# Altium PCB CosmoLink_Alpha_V0.00.PcbDoc
Units mm, origin at the board's own origin, x right, y up, seen from the top; angles counter-clockwise.
Board outline 26.67 x 20.32 mm, 4 copper layers (Top Layer, Layer 1, Layer 2, Bottom Layer), stack 1.587 mm thick; 36 components, 30 nets, 147 pads, 85 vias.
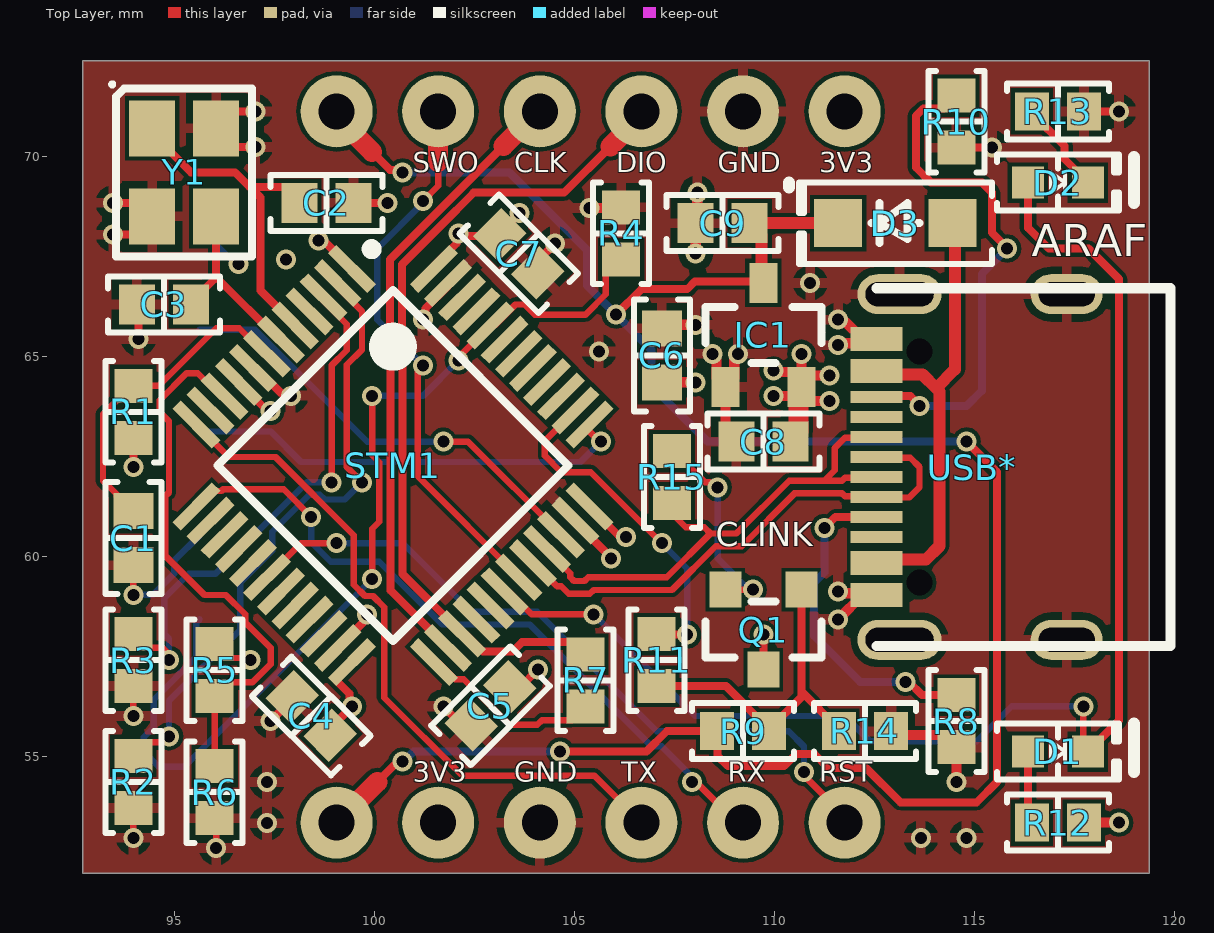
[diagram p0: Top Layer view]
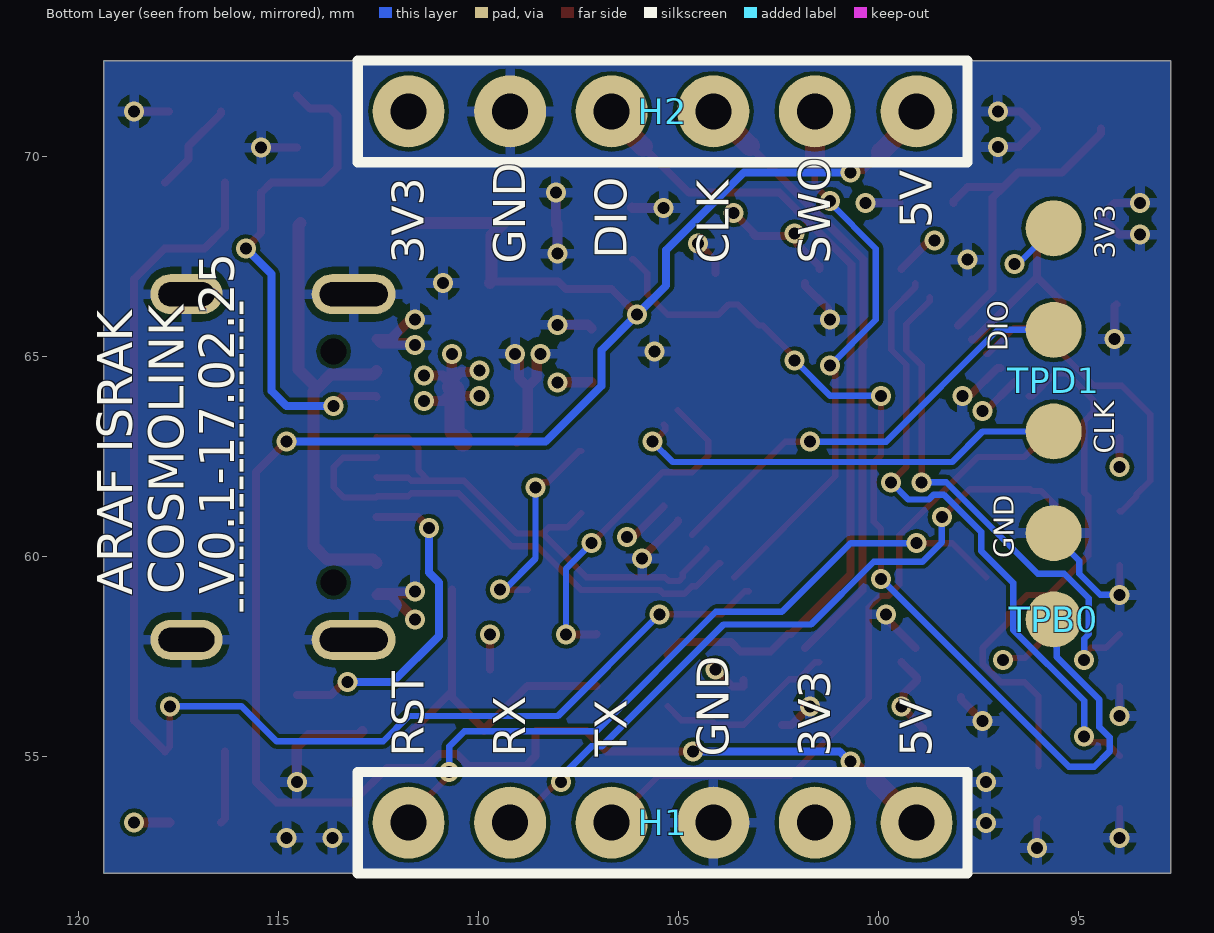
[diagram p1: Bottom Layer view, seen from below]
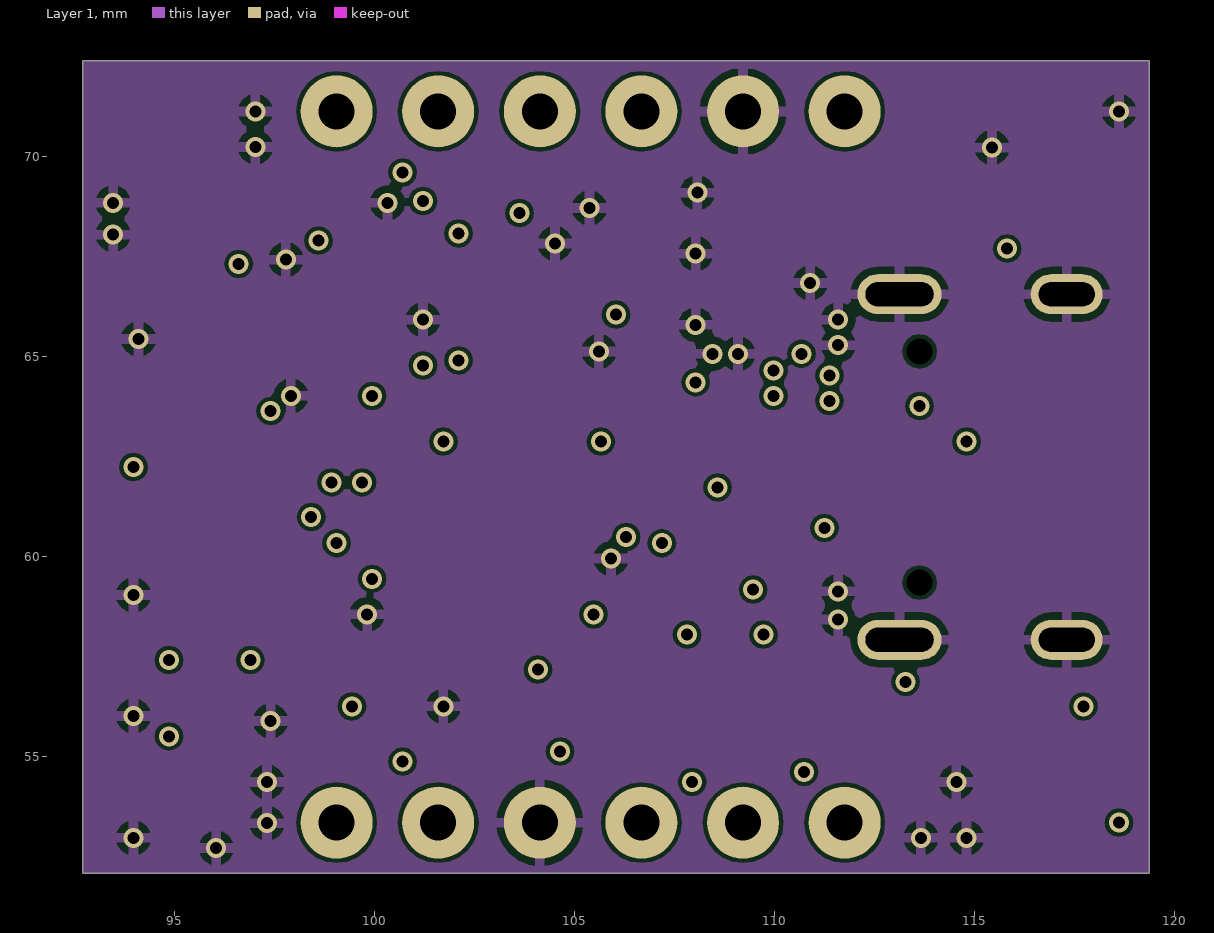
[diagram p2: Layer 1]
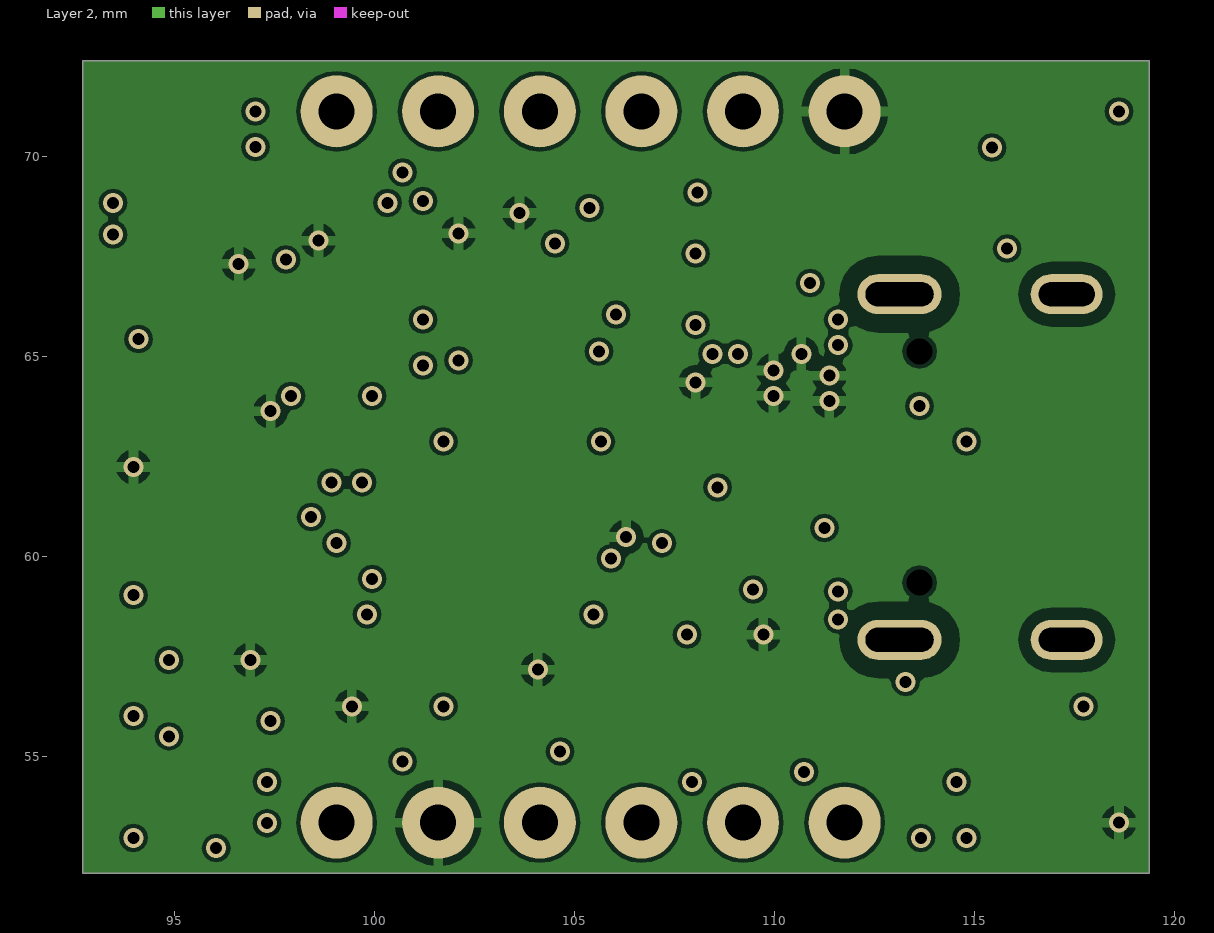
[diagram p3: Layer 2]
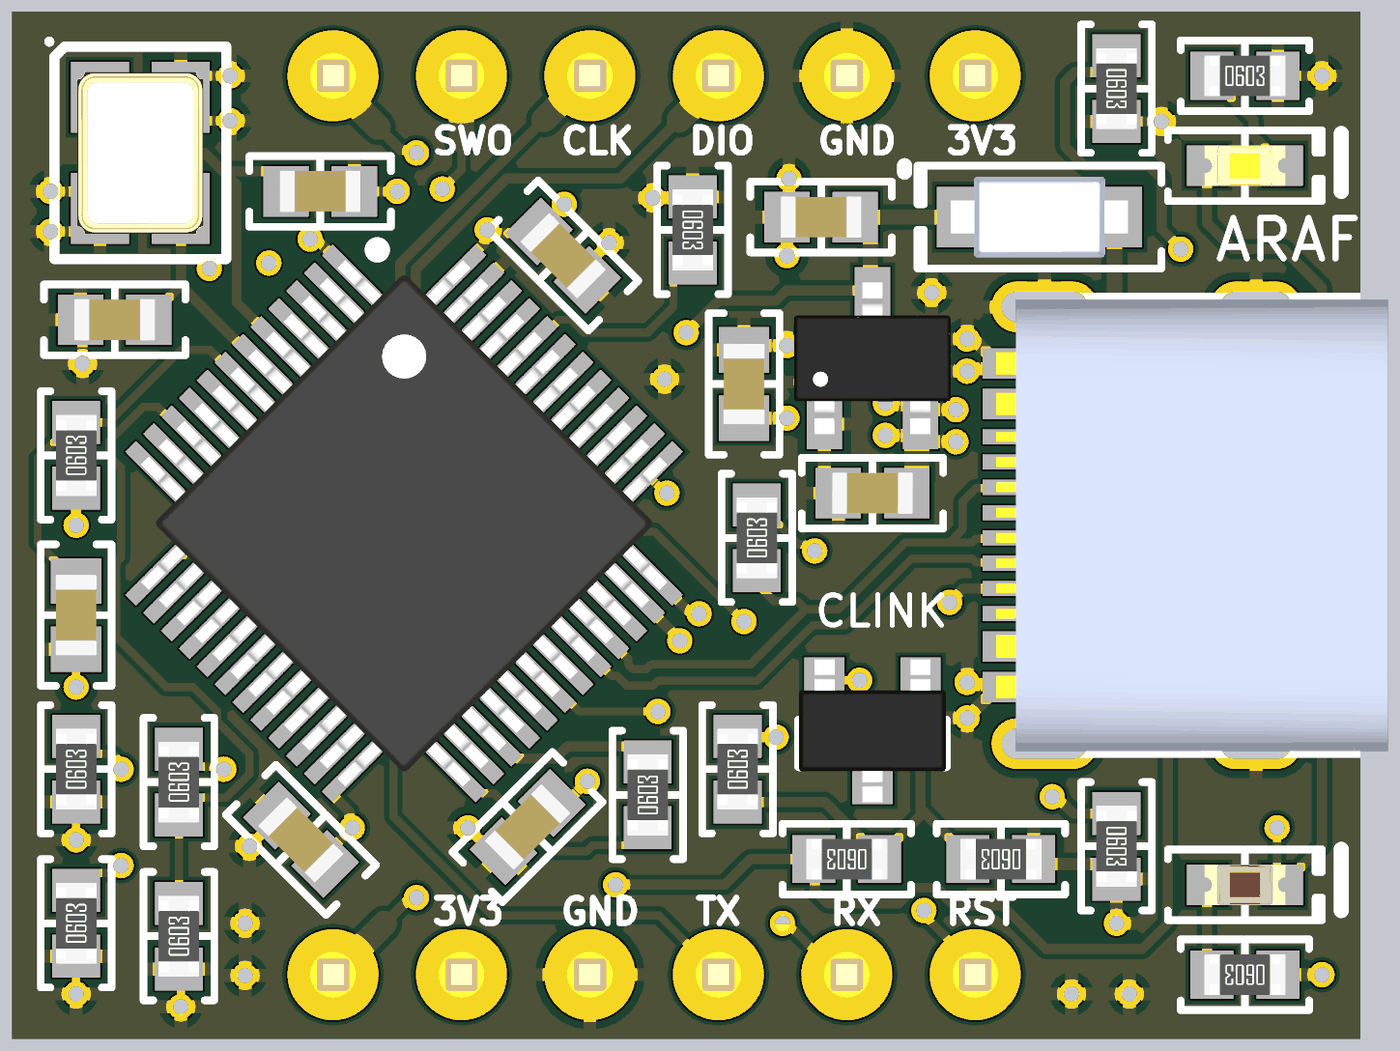
[diagram p4: 3D render of the assembled board from above, using the file's embedded part models]

## Layer stack, top to bottom
Top Solder: solder mask 0.0102, Solder Resist, Dk 3.5
Top Layer: signal copper 0.0356
Dielectric 2: prepreg 0.21, PP-006, Dk 4.1
Layer 1: signal copper 0.0153
Dielectric 1: dielectric 1.065, FR-4, Dk 4.8
Layer 2: signal copper 0.0153
Dielectric 3: prepreg 0.21, PP-006, Dk 4.1
Bottom Layer: signal copper 0.0356
Bottom Solder: solder mask 0.0102, Solder Resist, Dk 3.5

## Board outline
92.71,52.07 92.71,72.39 119.38,72.39 119.38,52.07

## Design rules (kind name [scope] priority, off if disabled: settings)
Clearance "Stitching GND" [IsStitchingVia and InNet('GND') vs (IsVia and (Not IsStitchingVia)) Or IsPad] p1: gap=0.127 ignorepadtopadclearanceinfootprint=FALSE
Clearance [All] p2: gap=0.1 ignorepadtopadclearanceinfootprint=TRUE
DiffPairsRouting [All] p1: maxlimit=0.254 minlimit=0.16 mostfreqgap=0.16 toplayer_minwidth=0.16 toplayer_maxwidth=0.381 toplayer_prefwidth=0.2 midlayer1_minwidth=0.16 midlayer1_maxwidth=0.381 midlayer1_prefwidth=0.2 midlayer2_minwidth=0.16 midlayer2_maxwidth=0.381 midlayer2_prefwidth=0.2 bottomlayer_minwidth=0.16 bottomlayer_maxwidth=0.381 bottomlayer_prefwidth=0.2 maxuncoupledlength=12.7
HoleSize [All] p1: absolutevalues=TRUE maxlimit=2.54 minlimit=0.04 maxpercent=80.000 minpercent=20.000
HoleToHoleClearance [All] p1: gap=0.04 allowstackedmicrovias=TRUE
MinimumSolderMaskSliver [All] p1: minsoldermaskwidth=0.04
PolygonConnect [All] p1: connectstyle=Relief reliefconductorwidth=0.254 reliefentries=4 polygonreliefangle="90 Angle" airgapwidth=0.18
RoutingVias [All] p1: holewidth=0.3 width=0.5 viastyle="Through Hole" minholewidth=0.3 minwidth=0.5 maxholewidth=0.3 maxwidth=0.5
SilkToSilkClearance [All] p1: silktosilkclearance=0.04
SilkToSolderMaskClearance [IsPad] p1: minsilkscreentomaskgap=0.04 clearancetoexposedcopper=TRUE
SolderMaskExpansion [All] p1: expansion=0.04
Width [All] p1: maxlimit=0.5 minlimit=0.16 preferedwidth=0.2
24 further rules are at their usual default settings.

## Classes and differential pairs
differential pair DF: +DF_P -DF_N

## Components (designator, comment, footprint, x,y, rotation, side; value= is the part's Value field where it differs from the comment)
C1 "0.1µF" "CAP 0603_1608" 93.98,60.452 r90 top
C2 "22 pF" "CAP 0603_1608" 98.806,68.834 r180 top
C3 "22 pF" "CAP 0603_1608" 94.742,66.294 r0 top
C4 "0.1µF" "CAP 0603_1608" 98.425,56.007 r315 top
C5 "0.1µF" "CAP 0603_1608" 102.906,56.261 r45 top
C6 "0.1µF" "CAP 0603_1608" 107.188,65.024 r270 top
C7 "0.1µF" "CAP 0603_1608" 103.613,67.564 r135 top
C8 "10µF" "CAP 0603_1608" 109.728,62.865 r0 top
C9 "10µF" "CAP 0603_1608" 108.712,68.326 r0 top
D1 "Red" "LED 0603_1608 RED" 117.094,55.118 r0 top
D2 "Yellow" "LED 0603_1608 YELLOW" 117.094,69.342 r0 top
D3 "SMF43A" SOD123F 113.03,68.326 r180 top
H1 "2.54mm_TH_1x6_pin_header" 2.54mm_TH_1x6_pin_header 102.87,53.34 r0 bottom
H2 "2.54mm_TH_1x6_pin_header" 2.54mm_TH_1x6_pin_header 102.87,71.12 r0 bottom
IC1 "AP2138N-3.3TRG1" "DIODES SOT-23-3 N" 109.728,65.532 r90 top
Q1 "DNLS160-7" "DIODES SOT-23-3" 109.728,58.166 r270 top
R1 "100k Ohms" "RES 0603_1608" 93.98,63.612 r90 top
R2 "10 kOhms" "RES 0603_1608" 93.98,54.356 r90 top
R3 "10 kOhms" "RES 0603_1608" 93.98,57.404 r90 top
R4 "100k Ohms" "RES 0603_1608" 106.172,68.072 r270 top
R5 "4.7k Ohms" "RES 0603_1608" 96.012,57.15 r90 top
R6 "4.7k Ohms" "RES 0603_1608" 96.012,54.102 r90 top
R7 "100 Ohms" "RES 0603_1608" 105.283,56.896 r90 top
R8 "5.1k Ohms" "RES 0603_1608" 114.554,55.88 r270 top
R9 "10 kOhms" "RES 0603_1608" 109.22,55.626 r180 top
R10 "5.1k Ohms" "RES 0603_1608" 114.554,70.866 r270 top
R11 "100 Ohms" "RES 0603_1608" 107.061,57.404 r90 top
R12 "330 Ohms" "RES 0603_1608" 117.094,53.34 r180 top
R13 "330 Ohms" "RES 0603_1608" 117.094,71.12 r0 top
R14 "33k Ohms" "RES 0603_1608" 112.268,55.626 r180 top
R15 "1.5k Ohms" "RES 0603_1608" 107.442,61.98 r90 top
STM1 "STM32F103CBT6" STM32F103CBT6_FOOTPRINT 100.466,62.269 r315 top
TPB0 "TP_1" TP1 95.631,58.42 r180 bottom
TPD1 "TP_4" TP4 95.631,68.199 r270 bottom
USB* "Made by Araf Israk" "USB TYPE-C 24P SMD" 114.935,62.23 r90 top
Y1 "8 MHz" "EPSON TSX-3225" 95.25,69.596 r270 top

## Footprints (in the part's own frame and the unit in brackets; to place one, negate y for a bottom-side part, rotate by r counter-clockwise, add the part's x,y. Pads: shape width x height; smd on the part's side, far side on the other; paste and mask are expansions set on the pad)
2.54mm_TH_1x6_pin_header [mm]
  round 1.8 hole 0.9: 1(-3.81,0) 2(-1.27,0) 3(1.27,0) 4(3.81,0) 5(6.35,0) 6(8.89,0)
  silkscreen extent -5.08,-1.27 10.16,1.27, body extent -5.08,-1.25 10.16,1.25, height 8.6
"CAP 0603_1608" [mm] "Chip Capacitor, 2-Leads, Body 1.60x0.80mm, IPC Medium Density"
  rect 0.9x1 smd: 1(-0.675,0) 2(0.675,0)
  silkscreen extent -1.4,-0.7 1.4,0.7, body extent -0.8,-0.41 0.8,0.41, height 0.82
"DIODES SOT-23-3" [mm] "SOT23, 3-Leads, Body 2.90x2.40mm, Pitch 0.95mm, IPC Medium Density"
  rect 0.9x0.8 smd: 1(-1,0.95) 2(-1,-0.95) 3(1,0)
  silkscreen extent -0.7,-1.45 0.7,1.45, body extent -1.41,-1.45 1.41,1.45, height 1.5
"DIODES SOT-23-3 N" [mm] "SOT23, 3-Leads, Body 2.90x2.40mm, Pitch 0.95mm, IPC Medium Density"
  rect 1x0.7 smd: 1(-1.3,0.95) 2(-1.3,-0.95) 3(1.3,0)
  silkscreen extent -0.7,-1.45 0.7,1.45, body extent -1.5,-1.55 1.5,1.55, height 1.45
"EPSON TSX-3225" [mm] "Crystal, 4-Leads, Body 2.50x3.20mm, Pitch 2.20mm, IPC Medium Density"
  rect 1.4x1.15 smd: 1(-1.1,-0.8) 2(1.1,-0.8) 3(1.1,0.8) 4(-1.1,0.8)
  silkscreen extent -2.25,-1.85 2.1,1.7, body extent -1.61,-1.26 1.61,1.26, height 0.6
"LED 0603_1608 RED" [mm] "Chip Diode, 2-Leads, Body 1.60x0.80mm, IPC Medium Density"
  rect 0.8x0.8 smd: 1(-0.75,0) 2(0.75,0)
  silkscreen extent -1.52,-0.7 1.52,0.7, body extent -0.8,-0.4 0.8,0.4, height 0.53
"LED 0603_1608 YELLOW" [mm] "Chip Diode, 2-Leads, Body 1.60x0.80mm, IPC Medium Density"
  rect 0.8x0.8 smd: 1(-0.75,0) 2(0.75,0)
  silkscreen extent -1.52,-0.7 1.52,0.7, body extent -0.8,-0.4 0.8,0.4, height 0.53
"RES 0603_1608" [mm] "Chip Resistor, 2-Leads, Body 1.60x0.80mm, IPC Medium Density"
  rect 0.85x0.95 smd: 1(-0.65,0) 2(0.65,0)
  silkscreen extent -1.27,-0.7 1.27,0.7, body extent -0.8,-0.4 0.8,0.4, height 0.45
SOD123F [mm] "SODFL, 2-Leads, Body 1.60x3.50mm, IPC Medium Density"
  rect 1.2x1.2 smd: 1(-1.43,0) 2(1.43,0)
  silkscreen extent -2.41,-1.02 2.41,1.02, body extent -1.75,-0.8 1.75,0.8, height 1.1
STM32F103CBT6_FOOTPRINT [mm] "TSQFP, 48-Leads, Body 7.00x7.00mm, Pitch 0.50mm, IPC Medium Density"
  rect 1.4x0.3 smd mask+0.04: 1(-4.2,2.75) 2(-4.2,2.25) 3(-4.2,1.75) 4(-4.2,1.25) 5(-4.2,0.75) 6(-4.2,0.25) 7(-4.2,-0.25) 8(-4.2,-0.75) 9(-4.2,-1.25) 10(-4.2,-1.75) 11(-4.2,-2.25) 12(-4.2,-2.75) 25(4.2,-2.75) 26(4.2,-2.25) 27(4.2,-1.75) 28(4.2,-1.25) 29(4.2,-0.75) 30(4.2,-0.25) 31(4.2,0.25) 32(4.2,0.75) 33(4.2,1.25) 34(4.2,1.75) 35(4.2,2.25) 36(4.2,2.75)
  rect 0.3x1.4 smd mask+0.04: 13(-2.75,-4.2) 14(-2.25,-4.2) 15(-1.75,-4.2) 16(-1.25,-4.2) 17(-0.75,-4.2) 18(-0.25,-4.2) 19(0.25,-4.2) 20(0.75,-4.2) 21(1.25,-4.2) 22(1.75,-4.2) 23(2.25,-4.2) 24(2.75,-4.2) 37(2.75,4.2) 38(2.25,4.2) 39(1.75,4.2) 40(1.25,4.2) 41(0.75,4.2) 42(0.25,4.2) 43(-0.25,4.2) 44(-0.75,4.2) 45(-1.25,4.2) 46(-1.75,4.2) 47(-2.25,4.2) 48(-2.75,4.2)
  silkscreen extent -4.32,-3.1 3.1,3.57, body extent -4.5,-4.5 4.5,4.5, height 1.6
TP1 [mm]
  round 1.4 smd: 1(0,0)
TP4 [mm]
  round 1.4 smd: 1(0,0) 2(2.54,0) 3(5.08,0) 4(7.62,0)
"USB TYPE-C 24P SMD" [mm]
  rect 0.6x1.3 smd mask+0.038: 1(-3.2,2.378) 2(-2.4,2.378) 11(2.4,2.378) 12(3.2,2.378)
  rect 0.3x1.3 smd mask+0.038: 3(-1.75,2.378) 4(-1.25,2.378) 5(-0.75,2.378) 6(-0.25,2.378) 7(0.25,2.378) 8(0.75,2.378) 9(1.25,2.378) 10(1.75,2.378)
  round 0 hole 0.65: 4(-2.89,1.303) 4(2.89,1.303)
  rrect100% 1x1.8 hole 1.4 slot 0.6 at 0 deg: 13(-4.32,-2.377) 13(4.32,-2.377)
  rrect100% 1x2.1 hole 1.7 slot 0.6 at 0 deg: 13(-4.32,1.803) 13(4.32,1.803)
  Top Layer pour cut-out: -2.289,2.378
  silkscreen extent -4.47,-4.97 4.47,2.38, body extent -4.47,-4.98 4.47,2.77, height 3.16

## Part data
C1 C4 C5 C6 C7: library part 06031C104KAT2A, "CAP CER 0.1UF 100V X7R 0603", Capacitance=100nF, Device Package="0603 (1608 Metric)", Manufacturer="AVX Corporation", Operating Temperature="-55°C ~ 125°C", Supplier Part Number 1=478-10047-1-ND, Temperature Coefficient=X7R, Tolerance=±10%, Voltage - Rated=100V, Applications="General Purpose", ComponentLink1Description=Datasheet, ComponentLink1URL=http://datasheets.avx.com/X7RDielectric.pdf, ComponentLink2Description="DigiKey Link", ComponentLink2URL=http://digikey.com/product-detail/en/avx-corporation/06031C104KAT2A/478-10047-1-ND/6564270, LastUpdated="9/2/2020 1:03:14 AM", Lifecycle Status=Active, Minimum Order=1, Mounting Type="Surface Mount, MLCC", Package / Case="0603 (1608 Metric)", Packaging=TapeAndReel, PartId=14077, Part Number=06031C104KAT2A, Part Status=Active, Price=0.03, Series=-, Size / Dimension="0.063\" L x 0.032\" W (1.60mm x 0.81mm)", Supplier 1=DigiKey, Thickness (Max)="0.037\" (0.94mm)"
C2 C3: library part C06CF220F-9ZN-X0T, "HIGH-Q MLCC (CF): 0603, 22 PF (1", Device Package="0603 (1608 Metric)", Manufacturer="Knowles Dielectric Labs", Operating Temperature="-55°C ~ 125°C", Supplier Part Number 1=1761-C06CF220F-9ZN-X0TCT-ND, Temperature Coefficient="C0G, NP0", Tolerance=±1%, Voltage - Rated=250V, Applications="RF, Microwave, High Frequency", Capacitance="22 pF", ComponentLink1Description=Datasheet, ComponentLink1URL=https://media.digikey.com/pdf/Data%20Sheets/Knowles%20Dielectric%20Labs%20PDFs/MLC_SLC_Cap_Cat.pdf, ComponentLink2Description="DigiKey Link", ComponentLink2URL=https://www.digikey.com/en/products/detail/knowles-dielectric-labs/C06CF220F-9ZN-X0T/19203937, Features="High Q, Low Loss", LastUpdated="2/9/2024 8:08:55 PM", Lifecycle Status=Active, Minimum Order=1, Mounting Type="Surface Mount, MLCC", Package / Case="0603 (1608 Metric)", Packaging=TapeAndReel, PartId=55085, Part Number=C06CF220F-9ZN-X0T, Part Status=Active, Price=2.56, Series=CF, Size / Dimension="0.060\" L x 0.030\" W (1.52mm x 0.76mm)", Supplier 1=DigiKey, Thickness (Max)="0.031\" (0.80mm)"
C8 C9: library part 06031C104KAT2A, "CAP CER 0.1UF 100V X7R 0603", Capacitance=10uF, Device Package="0603 (1608 Metric)", Manufacturer="AVX Corporation", Operating Temperature="-55°C ~ 125°C", Supplier Part Number 1=478-10047-1-ND, Temperature Coefficient=X7R, Tolerance=±10%, Voltage - Rated=100V, Applications="General Purpose", ComponentLink1Description=Datasheet, ComponentLink1URL=http://datasheets.avx.com/X7RDielectric.pdf, ComponentLink2Description="DigiKey Link", ComponentLink2URL=http://digikey.com/product-detail/en/avx-corporation/06031C104KAT2A/478-10047-1-ND/6564270, LastUpdated="9/2/2020 1:03:14 AM", Lifecycle Status=Active, Minimum Order=1, Mounting Type="Surface Mount, MLCC", Package / Case="0603 (1608 Metric)", Packaging=TapeAndReel, PartId=14077, Part Number=06031C104KAT2A, Part Status=Active, Price=0.03, Series=-, Size / Dimension="0.063\" L x 0.032\" W (1.60mm x 0.81mm)", Supplier 1=DigiKey, Thickness (Max)="0.037\" (0.94mm)"
D1: library part VFHR1111C-3BY2A-TR, "LED RED DIFFUSED 1608 SMD", Current - Test=20mA, Device Package="0603 (1608 Metric)", Lens Color=White, Manufacturer="Stanley Electric Co", Millicandela Rating=91mcd, Supplier Device Package=1608, Supplier Part Number 1=404-1310-1-ND, Voltage - Forward (Vf) (Typ)=1.9V, Color=Red, ComponentLink1Description=Datasheet, ComponentLink1URL=http://www.stanley-components.com/php/downloaddatafile.php?rp=0,VFHR1111C-3BY2A-TR_e.pdf, ComponentLink2Description="DigiKey Link", ComponentLink2URL=https://www.digikey.com/en/products/detail/stanley-electric-co/VFHR1111C-3BY2A-TR/6615658, Configuration=Standard, Height (Max)=0.80mm, LastUpdated="6/3/2024 7:59:48 PM", Lens Size="1.10mm x 0.80mm", Lens Style="Rectangle with Flat Top", Lens Transparency=Diffused, Lifecycle Status=Active, Minimum Order=1, Mounting Type="Surface Mount", Package / Case="0603 (1608 Metric)", Packaging=TapeAndReel, PartId=373, Part Number=VFHR1111C-3BY2A-TR, Part Status=Active, Price=0.06, Series=-, Size / Dimension="1.60mm L x 0.80mm W", Supplier 1=DigiKey, Viewing Angle=140°, Wavelength - Dominant=626nm, Wavelength - Peak=635nm
D2: library part 5973405507F, "LED YELLOW 0603 SMD", Current - Test=20mA, Device Package="0603 (1608 Metric)", Lens Color=0.68mm, Manufacturer=Dialight, Millicandela Rating=224mcd, Supplier Device Package=0603, Supplier Part Number 1=350-4378-1-ND, Voltage - Forward (Vf) (Typ)=2.1V, Color=Yellow, ComponentLink1Description=Datasheet, ComponentLink1URL=http://www.dialightsignalsandcomponents.com/Assets/Drawings/2D_Drawings_DrawingDetailedSpec/NewDrawings/18369A.pdf, ComponentLink2Description="DigiKey Link", ComponentLink2URL=https://www.digikey.com/en/products/detail/dialight/5973405507F/9385433, Configuration=Standard, Height (Max)=0.68mm, LastUpdated="6/3/2024 8:01:10 PM", Lens Size="1.20mm x 0.80mm", Lens Style="Rectangle with Flat Top", Lifecycle Status=Active, Minimum Order=1, Mounting Type="Surface Mount", Package / Case="0603 (1608 Metric)", Packaging=TapeAndReel, PartId=87, Part Number=5973405507F, Part Status=Active, Price=0.08, Series=597, Size / Dimension="1.60mm L x 0.80mm W", Supplier 1=DigiKey, Wavelength - Dominant=590nm
D3: "TVS SOD123FL 43V 200W UNIDIR", Current - Peak Pulse (10/1000µs)=2.9A, Manufacturer="Littelfuse Inc.", Operating Temperature="-55°C ~ 150°C (TJ)", Package / Case=SOD-123F, Power - Peak Pulse=200W, Power Line Protection=No, Supplier Part Number 1=F5830CT-ND, Voltage - Breakdown (Min)=47.8V, Voltage - Clamping (Max) @ Ipp=69.4V, Voltage - Reverse Standoff (Typ)=43V, Applications="General Purpose", ComponentLink1Description=Datasheet, ComponentLink1URL=https://www.littelfuse.com/~/media/electronics/datasheets/tvs_diodes/littelfuse_tvs_diode_smf_datasheet.pdf.pdf, ComponentLink2Description="DigiKey Link", ComponentLink2URL=https://www.digikey.com/en/products/detail/littelfuse-inc/SMF43A/3672410, LastUpdated="6/3/2024 8:22:37 PM", Lifecycle Status=Active, Minimum Order=1, Mounting Type="Surface Mount", Packaging=TapeAndReel, PartId=10081, Part Number=SMF43A, Part Status=Active, Price=0.08, Series=SMF, Supplier 1=DigiKey, Supplier Device Package=SOD-123F, Type=Zener, Unidirectional Channels=1
IC1: "IC REG LINEAR 3.3V 250MA SOT23-3", Current - Output=250mA, Current - Quiescent (Iq)="1.5 µA", Manufacturer="Diodes Incorporated", Operating Temperature="-40°C ~ 85°C (TA)", Package / Case="TO-236-3, SC-59, SOT-23-3", Supplier Device Package=SOT-23-3, Supplier Part Number 1=AP2138N-3.3TRG1DICT-ND, Voltage - Input (Max)=6V, Voltage - Output (Min/Fixed)=3.3V, Voltage Dropout (Max)="0.6V @ 250mA", ComponentLink1Description=Datasheet, ComponentLink1URL=https://www.diodes.com/assets/Datasheets/AP2138-9.pdf, ComponentLink2Description="DigiKey Link", ComponentLink2URL=https://www.digikey.com/en/products/detail/diodes-incorporated/AP2138N-3-3TRG1/4470804, LastUpdated="6/3/2024 8:26:00 PM", Lifecycle Status=Active, Minimum Order=1, Mounting Type="Surface Mount", Number of Regulators=1, Output Configuration=Positive, Output Type=Fixed, Packaging=TapeAndReel, Part Number=AP2138N-3.3TRG1, Part Status=Active, Price=0.08, Protection Features="Over Current", Series=-, Supplier 1=DigiKey
Q1: "TRANS NPN 60V 1A SOT23-3", Current - Collector (Ic) (Max)=1A, Current - Collector Cutoff (Max)=100nA, DC Current Gain (hFE) (Min) @ Ic, Vce="200 @ 500mA, 5V", Frequency - Transition=270MHz, Manufacturer="Diodes Incorporated", Operating Temperature="-55°C ~ 150°C (TJ)", Package / Case="TO-236-3, SC-59, SOT-23-3", Power - Max=300mW, Supplier Device Package=SOT-23-3, Supplier Part Number 1=DNLS160DICT-ND, Voltage - Collector Emitter Breakdown (Max)=60V, ComponentLink1Description=Datasheet, ComponentLink1URL=https://www.diodes.com/assets/Datasheets/ds31390.pdf, ComponentLink2Description="DigiKey Link", ComponentLink2URL=http://digikey.com/product-detail/en/diodes-incorporated/DNLS160-7/DNLS160DICT-ND/1964776, LastUpdated="6/3/2024 8:24:10 PM", Lifecycle Status=Active, Minimum Order=1, Mounting Type="Surface Mount", Packaging=CutTape, PartId=44, Part Number=DNLS160-7, Part Status=Active, Price=0.45, Series=-, Supplier 1=DigiKey, Transistor Type=NPN, Vce Saturation (Max) @ Ib, Ic="250mV @ 100mA, 1A"
R1 R4 R5 R6 R7 R8 R10 R11 R12 R13 R14 R15: library part RNCS0603BKE10K0, "RES 10K OHM 0.1% 1/16W 0603", Device Package="0603 (1608 Metric)", Manufacturer="Stackpole Electronics Inc", Operating Temperature="-55°C ~ 155°C", Power (Watts)="0.063W, 1/16W", Ratings=AEC-Q200, Resistance="100 kOhms", Supplier Device Package=0603, Supplier Part Number 1=RNCS0603BKE10K0CT-ND, Temperature Coefficient=±25ppm/°C, Tolerance=±0.1%, ComponentLink1Description=Datasheet, ComponentLink1URL=https://www.seielect.com/catalog/sei-rncs_rnch.pdf, ComponentLink2Description="DigiKey Link", ComponentLink2URL=https://www.digikey.com/en/products/detail/stackpole-electronics-inc/RNCS0603BKE10K0/1708836, Composition="Thin Film", Features="Anti-Corrosive, Automotive AEC-Q200, Moisture Resistant", Height - Seated (Max)="0.022\" (0.55mm)", LastUpdated="2/9/2024 8:43:37 PM", Lifecycle Status=Active, Minimum Order=1, Number of Terminations=2, Package / Case="0603 (1608 Metric)", Packaging=TapeAndReel, PartId=4838, Part Number=RNCS0603BKE10K0, Part Status=Active, Price=0.06, Series=RNCS, Size / Dimension="0.061\" L x 0.031\" W (1.55mm x 0.80mm)", Supplier 1=DigiKey
R2 R3 R9: library part RNCS0603BKE10K0, "RES 10K OHM 0.1% 1/16W 0603", Device Package="0603 (1608 Metric)", Manufacturer="Stackpole Electronics Inc", Operating Temperature="-55°C ~ 155°C", Power (Watts)="0.063W, 1/16W", Ratings=AEC-Q200, Supplier Device Package=0603, Supplier Part Number 1=RNCS0603BKE10K0CT-ND, Temperature Coefficient=±25ppm/°C, Tolerance=±0.1%, ComponentLink1Description=Datasheet, ComponentLink1URL=https://www.seielect.com/catalog/sei-rncs_rnch.pdf, ComponentLink2Description="DigiKey Link", ComponentLink2URL=https://www.digikey.com/en/products/detail/stackpole-electronics-inc/RNCS0603BKE10K0/1708836, Composition="Thin Film", Features="Anti-Corrosive, Automotive AEC-Q200, Moisture Resistant", Height - Seated (Max)="0.022\" (0.55mm)", LastUpdated="2/9/2024 8:43:37 PM", Lifecycle Status=Active, Minimum Order=1, Number of Terminations=2, Package / Case="0603 (1608 Metric)", Packaging=TapeAndReel, PartId=4838, Part Number=RNCS0603BKE10K0, Part Status=Active, Price=0.06, Resistance="10 kOhms", Series=RNCS, Size / Dimension="0.061\" L x 0.031\" W (1.55mm x 0.80mm)", Supplier 1=DigiKey
STM1: "128KB 2V~3.6V ARM-M3 20KB 72MHz FLASH 37 LQFP-48(7x7) Microcontrollers (MCU/MPU/SOC) ROHS", JLCPCB Part #=C8304, Package=LQFP-48, ComponentLink1Description=Datasheet, ComponentLink1URL=https://www.st.com/resource/en/datasheet/cd00161566.pdf, ComponentLink2Description="JLCPCB Parts", ComponentLink2URL=https://jlcpcb.com/partdetail/Stmicroelectronics-STM32F103CBT6/C8304, MFR.Part #=STM32F103CBT6
USB*: library part "USB TYPE-C 24P SMD", Current Rating="5 Amp", LCSC Part=C2765186, Voltage Rating="3.3V - 48V", ComponentLink1Description=lcsc, ComponentLink1URL=https://www.lcsc.com/product-detail/USB-Connectors_SHOU-HAN-TYPE-C-16PIN-2MD-073_C2765186.html, ComponentLink2Description="datasheet 1", ComponentLink2URL=https://www.lcsc.com/datasheet/lcsc_datasheet_2111231930_SHOU-HAN-TYPE-C-16PIN-2MD-073_C2765186.pdf, ComponentLink3Description="datasheet 2", ComponentLink3URL=https://www.digikey.com/en/products/detail/gct/USB4105-GF-A/11198441, ComponentLink4Description=aliexpress, ComponentLink4URL=https://www.aliexpress.com/item/1005006353547160.html?spm=a2g0o.order_list.order_list_main.61.296f18023vUA5z, Gender=Female, Pin Number=16, Stock=~30, USB Type="TYPE-C 16PIN / 24PIN"
Y1: library part "TSX-3225 16.0000MF10U-B0", "CRYSTAL 16.0000MHZ 16PF SMD", ESR (Equivalent Series Resistance)="60 Ohms", Frequency="16 MHz", Frequency Stability=±10ppm, Load Capacitance=16pF, Manufacturer=EPSON, Operating Mode=Fundamental, Operating Temperature="-10°C ~ 60°C", Package / Case="4-SMD, No Lead", Supplier Part Number 1=SER4370CT-ND, ComponentLink1Description=Datasheet, ComponentLink1URL=https://support.epson.biz/td/api/doc_check.php?dl=brief_TSX-3225&lang=en, ComponentLink2Description="DigiKey Link", ComponentLink2URL=https://www.digikey.com/en/products/detail/epson/TSX-3225-16-0000MF10U-B0/5260851, Frequency Tolerance=±10ppm, Height - Seated (Max)="0.024\" (0.60mm)", LastUpdated="6/3/2024 8:02:15 PM", Lifecycle Status=Active, Minimum Order=1, Mounting Type="Surface Mount", Packaging=TapeAndReel, PartId=436, Part Number="TSX-3225 16.0000MF10U-B0", Part Status=Active, Price=0.20, Series=TSX-3225, Size / Dimension="0.126\" L x 0.098\" W (3.20mm x 2.50mm)", Supplier 1=DigiKey, Type="MHz Crystal"

## Via types
v1: diameter 0.5, hole 0.3, Top Layer to Bottom Layer, 85 vias

## Nets (pads, with @x,y where several pads share a name; then routed paths per layer and width w, separated by ;. In a path a pad name is that pad's centre, name@x,y a point inside that pad or via, vN(x,y) a via of type N, cw(c..) or ccw(c..) an arc to the next point about the centre after c; other vN are vias at no path point)
+3V3: C4.2 C5.2 C6.2 C7.2 C8.2 H1.2 H2.6 IC1.2 Q1.3 R1.1 R5.2 R12.1 STM1.1 STM1.9 STM1.24 STM1.36 STM1.48 TPD1.1 | length 21.2
  Top Layer w0.16: R5.2 96.357,57.455 96.85,57.455 v1(96.901,57.404)
  Top Layer w0.2: v1(93.98,62.23) R1.1 ; STM1.9 97.34,63.627 v1(97.409,63.627) ; v1(98.607,67.89) 98.734,67.89 STM1.1 ; C4.2 98.902,55.707 v1(99.441,56.246) 99.384,56.303 99.384,56.563 99.052,56.895 99.052,56.965 STM1.24 ; STM1.48 101.492,67.254 102.051,67.813 102.051,68.015 v1(102.108,68.072) 102.189,68.072 102.255,68.006 C7.2@103.1,68.006 ; C7.2 C7.2@103.1,68.006 ; C5.2@103.383,56.901 C5.2 103.663,56.738 v1(104.09,57.166) ; v1(103.632,68.58) 103.1,68.048 C7.2@103.1,68.006 ; STM1.36 106.088,60.536 106.243,60.536 v1(106.299,60.48) ; Q1.3 v1(109.728,58.039)
  Top Layer w0.254: C6.2 v1(108.037,64.349) ; v1(109.982,64.008) 110.455,64.008 110.609,64.162 IC1.2 ; v1(109.982,64.643) 110.02,64.605 110.455,64.605 IC1.2@110.678,64.382 ; v1(110.678,65.062) IC1.2@110.678,64.382 ; v1(111.379,63.881) 110.901,63.881 110.678,64.104 IC1.2 ; v1(111.379,64.516) 110.901,64.516 IC1.2@110.678,64.293 ; R12.1 v1(118.618,53.34) ; IC1.2 IC1.2@110.678,64.293 ; IC1.2@110.678,64.293 IC1.2@110.678,64.382
  Top Layer w0.5: C8.2 110.403,62.915 110.609,63.121 IC1.2@110.609,64.162 ; IC1.2@110.609,64.163 IC1.2
  Bottom Layer w0.16: TPD1.1 96.296,67.534 ; 96.296,67.534 96.521,67.31 v1(96.613,67.31)
+5: C9.2 D3.2 H1.1 H2.1 IC1.3 R9.2 | length 56
  Top Layer w0.2: 99.949,70.104 100.4,69.653 100.654,69.653 v1(100.711,69.596) ; 100.076,54.356 100.584,54.864 v1(100.711,54.864) ; v1(104.648,55.118) 106.807,55.118 107.315,55.626 R9.2 108.585,55.611 108.585,55.006 108.839,54.752 110.25,54.752 110.558,55.06 111.001,55.06 111.353,54.708 112.297,54.708 113.157,53.848 115.062,53.848 115.57,54.356 115.57,62.103 v1(114.808,62.865) ; v1(106.045,66.04) 106.68,66.675 107.823,66.675 108.021,66.873 IC1.3@109.687,66.873
  Top Layer w0.3: IC1.3 109.687,66.873 109.687,68.026 C9.2 D3.2
  Top Layer w0.5: H1.1 100.076,54.356 ; H2.1 99.06,70.993 99.949,70.104
  Bottom Layer w0.2: v1(100.711,54.864) 100.727,54.864 100.981,55.118 v1(104.648,55.118) ; v1(100.711,69.596) 103.379,69.596 105.318,67.658 105.318,66.767 v1(106.045,66.04) 106.934,65.151 106.934,64.262 108.331,62.865 v1(114.808,62.865)
CLK: STM1.37 TPD1.3 | length 11.2
  Top Layer w0.16: STM1.37 105.342,63.256 105.342,63.157 105.634,62.865 v1(105.664,62.865)
  Bottom Layer w0.16: TPD1.3 97.409,63.119 98.171,62.357 105.156,62.357 v1(105.664,62.865)
DF_N: STM1.32 USB*.5 USB*.7 | length 12.9
  Top Layer w0.16: STM1.32 103.989,59.829 104.571,59.248 104.675,59.248 104.863,59.06 105.39,59.06 105.485,59.156 107.445,59.156 108.539,60.25 109.185,60.25 110.505,61.57 111.252,61.57 111.695,61.57 111.769,61.496 112.541,61.496 USB*.5 112.57,61.468 113.378,61.468 113.632,61.722 113.632,62.23 113.398,62.464 112.573,62.464 USB*.7
DF_P: R15.1 STM1.33 USB*.6 USB*.8 | length 13
  Top Layer w0.16: STM1.33 104.32,60.16 104.902,59.579 104.902,59.474 104.995,59.38 105.257,59.38 105.352,59.476 107.313,59.476 108.407,60.57 ; R15.1@107.442,61.072 107.787,60.727 108.249,60.727 108.407,60.57 ; USB*.6 112.541,61.964 111.769,61.964 111.695,61.89 111.252,61.89 ; USB*.8 112.541,62.964 111.769,62.964 111.511,62.705 111.511,62.149 111.252,61.89 ; 108.407,60.57 109.052,60.57 110.372,61.89 111.252,61.89
DIO: STM1.34 TPD1.2 | length 11.2
  Top Layer w0.16: v1(101.727,62.865) 102.345,62.865 STM1.34
  Bottom Layer w0.16: TPD1.2 97.028,65.659 99.822,62.865 v1(101.727,62.865)
GND: C1.1 C2.1 C3.1 C4.1 C5.1 C6.1 C7.1 C8.1 C9.1 H1.3 H2.5 IC1.1 R2.1 R3.1 R4.1 R6.1 R8.2 R10.2 R13.2 R14.1 STM1.8 STM1.23 STM1.35 STM1.47 TPD1.4 USB*.1 USB*.12 USB*.13 Y1.2 Y1.4 | length 34.9
  Top Layer w0.16: v1(93.98,52.959) R2.1 ; v1(93.98,56.007) R3.1 ; v1(93.98,59.03) C1.1 ; R6.1 96.05,53.414 v1(96.05,52.705)
  Top Layer w0.2: v1(93.472,68.041) 93.995,68.041 Y1.2 94.112,68.834 v1(93.472,68.834) ; C3.1 94.107,66.254 v1(94.107,65.43) ; STM1.8 97.037,64.708 97.68,64.065 97.86,64.065 v1(97.917,64.008) ; v1(97.028,70.231) 96.515,70.231 Y1.4 96.474,71.12 v1(97.028,71.12) ; v1(97.409,55.88) 97.948,56.419 C4.1 ; STM1.23 99.822,58.442 v1(99.822,58.547) ; C2.1 v1(100.33,68.834) ; v1(101.219,65.913) 101.276,65.97 101.276,66.19 101.845,66.759 STM1.47 ; v1(101.727,56.246) 102.189,55.784 C5.1 ; C7.1 104.09,67.387 v1(104.521,67.818) ; STM1.35 105.027,60.862 105.918,59.971 v1(105.918,59.944) ; R10.2 v1(115.443,70.216) ; R13.2 v1(118.618,71.12)
  Top Layer w0.254: v1(105.381,68.707) 106.157,68.707 R4.1 ; C6.1 107.275,65.786 v1(108.037,65.786) ; v1(108.037,67.564) C9.1 108.077,68.286 v1(108.077,69.088) ; v1(108.458,65.062) 108.458,64.995 108.555,64.898 108.555,64.455 IC1.1 ; C8.1 108.778,63.14 IC1.1 ; v1(109.093,65.062) 109.093,64.995 109.001,64.903 109.001,64.455 IC1.1 ; v1(111.6,58.42) 111.6,58.423 112.207,59.03 USB*.1 112.512,59.076 111.646,59.076 v1(111.6,59.122) ; v1(111.6,65.278) 111.647,65.325 112.453,65.325 USB*.12 112.207,65.43 111.772,65.866 111.647,65.866 v1(111.6,65.913) ; R14.1 113.016,55.528 114.256,55.528 R8.2 v1(114.554,54.356)
  Bottom Layer w0.16: v1(93.98,59.03) 93.987,59.037 94.47,59.037 94.996,59.563 94.996,59.885 95.631,60.52 TPD1.4
  other v1: 113.665,52.959 114.808,52.959 97.32,53.325 97.32,54.356 105.617,65.12 110.9,66.829 97.79,67.416
LED: D1.2 D2.1 STM1.30 | length 33.6
  Top Layer w0.16: STM1.30 103.358,59.122 103.933,58.547 v1(105.485,58.547) ; v1(117.729,56.246) 117.729,55.233 D1.2
  Top Layer w0.2: D2.1 116.344,68.211 116.864,67.691 117.856,67.691 118.618,66.929 118.618,55.892 D1.2
  Bottom Layer w0.16: v1(105.485,58.547) 108.025,56.007 111.76,56.007 112.395,55.372 115.062,55.372 115.936,56.246 v1(117.729,56.246)
NetC1_2: C1.2 R1.2 STM1.7 | length 8
  Top Layer w0.16: C1.2 93.93,61.127 93.56,61.497 93.56,61.547 93.218,61.889 93.218,63.55 93.93,64.262 R1.2 94.615,64.262 96.052,65.699 96.628,65.699 97.265,65.062 STM1.7
NetC2_2: C2.2 STM1.5 Y1.1 | length 8.5
  Top Layer w0.2: Y1.1 94.45,70.571 95.425,69.596 96.525,69.596 96.887,69.234 ; STM1.5 97.155,66.641 97.155,68.966 96.887,69.234 ; C2.2 98.131,68.884 97.781,69.234 96.887,69.234
NetC3_2: C3.2 STM1.6 Y1.3 | length 4.7
  Top Layer w0.2: C3.2 95.417,66.344 96.05,66.977 ; Y1.3 96.05,66.977 ; STM1.6 97.612,65.415 96.05,66.977
NetD1_1: D1.1 R12.2 | length 1.8
  Top Layer w0.2: D1.1 116.344,53.44 R12.2
NetD2_2: D2.2 R13.1 | length 2.4
  Top Layer w0.2: R13.1 116.444,71.07 117.261,70.253 117.261,69.925 D2.2
NetQ1_1: Q1.1 R9.1 R11.1 R14.2 | length 8.5
  Top Layer w0.2: R11.1 108.792,56.754 R9.1@109.87,55.676 ; R9.1 R9.1@109.87,55.676 ; Q1.1 110.678,56.616 ; R14.2 111.618,55.676 110.678,56.616 ; R9.1@109.87,55.676 110.678,56.484 110.678,56.616
NetQ1_2: Q1.2 R15.2 | length 5.2
  Top Layer w0.16: R15.2 107.492,62.63 108.273,61.849 108.407,61.849 108.534,61.722 v1(108.585,61.722) ; Q1.2 v1(109.474,59.166)
  Bottom Layer w0.16: v1(108.585,61.722) 108.585,59.944 109.363,59.166 v1(109.474,59.166)
NetR2_2: R2.2 STM1.2 | length 15.7
  Top Layer w0.16: R2.2 94.325,55.351 94.721,55.351 v1(94.869,55.499) ; STM1.2 99.087,66.73 99.695,66.123 99.695,65.164 99.314,64.783 99.314,62.23 v1(99.695,61.849)
  Bottom Layer w0.16: v1(94.869,55.499) 94.869,56.388 96.647,58.166 96.647,59.34 97.447,60.14 97.447,60.61 98.375,61.538 98.636,61.538 98.755,61.419 99.265,61.419 v1(99.695,61.849)
NetR3_2: R3.2 STM1.3 | length 13.2
  Top Layer w0.16: R3.2 94.325,57.709 94.706,57.709 94.869,57.546 v1(94.869,57.404) ; STM1.3 98.734,66.377 99.314,65.797 99.314,65.151 98.933,64.77 v1(98.933,61.849)
  Bottom Layer w0.16: v1(94.869,57.404) 94.869,57.937 94.751,58.055 94.751,58.95 95.364,59.563 96.032,59.563 98.318,61.849 v1(98.933,61.849)
NetR4_2: R4.2 STM1.44 TPB0.1 | length 24.6
  Top Layer w0.16: v1(99.949,59.436) 99.949,60.69 100.125,60.866 100.125,62.349 99.949,62.525 v1(99.949,64.008) ; v1(102.108,64.897) 102.108,64.971 STM1.44 103.005,65.769 103.53,66.294 103.759,66.294 104.013,66.04 105.281,66.04 105.791,66.55 105.791,67.077 106.136,67.422 R4.2
  Bottom Layer w0.16: TPB0.1 95.553,58.342 95.553,57.48 94.488,56.415 94.488,55.726 94.234,55.472 94.234,55.118 94.615,54.737 95.25,54.737 v1(99.949,59.436) ; v1(99.949,64.008) 101.219,64.008 v1(102.108,64.897)
NetR5_1: R5.1 R6.2 STM1.10 | length 13.8
  Top Layer w0.16: R6.2 R5.1 96.357,56.845 96.95,56.845 97.409,57.304 97.409,57.708 96.774,58.343 96.774,58.547 96.291,59.03 95.758,59.03 94.771,60.017 94.771,61.497 94.869,61.595 94.869,63.373 94.624,63.618 94.635,63.63 94.635,63.901 95.307,64.573 95.588,64.573 96.16,64.001 STM1.10
NetR7_1: R7.1 STM1.25 | length 4.6
  Top Layer w0.16: STM1.25 101.591,57.354 102.018,56.927 102.24,56.927 103.383,55.784 104.077,55.784 104.194,55.901 104.938,55.901 R7.1
NetR8_1: R8.1 USB*.4@112.557,60.98 | length 8.4
  Top Layer w0.2: v1(111.252,60.706) 111.526,60.98 USB*.4@112.557,60.98 ; v1(113.284,56.86) 113.365,56.86 113.695,56.53 R8.1
  Bottom Layer w0.2: v1(111.252,60.706) 111.252,59.594 110.998,59.34 110.998,58.01 112.148,56.86 v1(113.284,56.86)
NetR10_1: R10.1 USB*.10 | length 13
  Top Layer w0.2: USB*.10 112.579,64.001 113.411,64.001 113.632,63.78 v1(113.632,63.754) ; R10.1 114.229,71.191 113.726,71.191 113.538,71.003 113.538,69.723 113.919,69.342 115.189,69.342 115.443,69.088 115.443,68.088 115.824,67.707 v1(115.824,67.691)
  Bottom Layer w0.2: v1(113.632,63.754) 114.808,63.754 115.189,64.135 115.189,67.056 v1(115.824,67.691)
RENUM: R11.2 STM1.38 | length 8.6
  Top Layer w0.16: STM1.38 104.267,62.887 104.267,62.51 104.674,62.103 105.41,62.103 v1(107.188,60.325)
  Top Layer w0.2: R11.2 107.076,58.039 v1(107.823,58.039)
  Bottom Layer w0.16: v1(107.188,60.325) 107.823,59.69 v1(107.823,58.039)
T_CLK: H2.3 STM1.26 | length 15.6
  Top Layer w0.2: STM1.26 100.405,59.148 100.405,65.222 100.391,65.236 100.391,67.415 101.358,68.383 103.229,70.253
  Top Layer w0.5: 103.229,70.253 104.095,71.12 H2.3
T_DIO: H2.4 R7.2 STM1.27 | length 21
  Top Layer w0.2: R7.2 104.975,57.854 103.7,57.854 103.459,57.614 102.717,57.614 102.269,58.061 STM1.27 100.705,59.555 100.705,65.346 100.691,65.361 100.691,67.291 101.658,68.258 102.488,69.088 104.746,69.088 105.903,70.246
  Top Layer w0.5: 105.903,70.246 106.68,71.022 H2.4
T_RST: H1.6 STM1.18 | length 18.2
  Top Layer w0.16: STM1.18 98.169,60.325 v1(99.06,60.325) ; v1(110.744,54.61) 110.744,54.518 111.76,53.502 H1.6
  Bottom Layer w0.16: v1(99.06,60.325) 100.711,60.325 102.425,58.61 104.076,58.61 107.061,55.626 110.363,55.626 110.744,55.245 v1(110.744,54.61)
T_RX: H1.5 STM1.13 | length 17.7
  Top Layer w0.16: STM1.13 95.941,61.632 96.181,61.632 96.22,61.671 97.734,61.671 v1(98.425,60.98) ; v1(107.95,54.356) 108.042,54.356 109.058,53.34 H1.5
  Bottom Layer w0.16: v1(98.425,60.98) 98.425,60.352 98.911,59.866 100.127,59.866 101.7,58.293 103.886,58.293 106.934,55.245 107.188,55.245 107.95,54.483 v1(107.95,54.356)
T_SWO: H2.2 STM1.31 | length 13.9
  Top Layer w0.16: v1(101.219,64.77) 101.186,64.77 101.092,64.676 101.092,61.996 STM1.31 ; v1(101.219,68.88) 101.6,69.261 101.6,69.85
  Top Layer w0.5: 101.6,69.85 H2.2
  Bottom Layer w0.16: v1(101.219,64.77) 100.076,65.913 100.076,67.691 101.219,68.834 v1(101.219,68.88)
T_TX: H1.4 STM1.12 | length 17.3
  Top Layer w0.16: STM1.12 96.366,62.48 97.533,62.48 99.49,60.523 99.49,59.287 99.771,59.006 99.971,59.006 100.252,58.725 100.252,56.466 102.205,54.513 105.507,54.513 H1.4
VBUS: D3.1 USB*.2 USB*.11 | length 11.7
  Top Layer w0.3: USB*.2 112.643,59.915 113.792,59.915 114.132,60.255 114.132,64.118 114.046,64.204 ; USB*.11 112.643,64.545 113.705,64.545 114.046,64.204 ; D3.1 114.516,68.27 114.516,64.674 114.046,64.204
pads on no net: STM1.4 STM1.11 STM1.14 STM1.15 STM1.16 STM1.17 STM1.19 STM1.20 STM1.21 STM1.22 STM1.28 STM1.29 STM1.39 STM1.40 STM1.41 STM1.42 STM1.43 STM1.45 STM1.46 USB*.3 USB*.4@113.632,59.34 USB*.4@113.632,65.12 USB*.9

## Polygon pours and split planes (outlines as drawn)
GND on Layer 1 "GND_L02_P000" (solid, pour order 0): 92.71,72.39 119.38,72.39 119.38,52.07 92.71,52.07
+3V3 on Layer 2 "+3V3_L03_P002" (solid, pour order 2): 92.71,72.39 119.38,72.39 119.38,52.07 92.71,52.07
GND on Bottom Layer "GND_L04_P006" (solid, pour order 6): 92.71,72.39 119.38,72.39 119.38,52.07 92.71,52.07
GND on Top Layer "GND_L01_P004" (solid, pour order 4): 92.71,72.39 119.38,72.39 119.38,52.07 92.71,52.07

## Silkscreen, mask and mechanical layers (free items; w line width, h text height)
Top Overlay:
  lines w0.3: 110.363,69.215 110.363,69.342 ; 118.999,54.61 118.999,55.818 ; 118.999,68.834 118.999,69.977
  text "SWO" at 100.965,69.596 h0.5
  text "CLK" at 103.505,69.596 h0.5
  text "DIO" at 106.045,69.596 h0.5
  text "GND" at 108.585,69.596 h0.5
  text "3V3" at 111.125,69.596 h0.5
  text "ARAF" at 116.444,67.503 h0.8
  text "CLINK" at 108.539,60.25 h0.6
  text "3V3" at 100.965,54.356 h0.5
  text "GND" at 103.505,54.356 h0.5
  text "TX" at 106.172,54.356 h0.5
  text "RX" at 108.839,54.356 h0.5
  text "RST" at 111.125,54.356 h0.5
Bottom Overlay:
  text "5V" at 98.679,68.199 h0.8 r270
  text "3V3" at 94.107,67.437 h0.5 r270
  text "DIO" at 106.299,67.437 h0.8 r270
  text "SWO" at 101.219,67.31 h0.8 r270
  text "CLK" at 103.759,67.31 h0.8 r270
  text "GND" at 108.839,67.31 h0.8 r270
  text "3V3" at 111.379,67.31 h0.8 r270
  text "DIO" at 96.774,65.12 h0.5 r270
  text "CLK" at 94.117,62.56 h0.5 r270
  text "GND" at 96.625,59.944 h0.5 r270
  text "V0.1-17.02.25" at 115.824,59.055 h1.5 r270
  text "COSMOLINK" at 117.094,59.055 h1.5 r270
  text "ARAF ISRAK" at 118.382,59.03 h1.5 r270
  text "------------------" at 115.316,58.547 h1.5 r270
  text "5V" at 98.679,54.991 h0.8 r270
  text "3V3" at 101.219,54.991 h0.8 r270
  text "GND" at 103.759,54.991 h0.8 r270
  text "TX" at 106.299,54.991 h0.8 r270
  text "RX" at 108.839,54.991 h0.8 r270
  text "RST" at 111.379,54.991 h0.8 r270
Mechanical 1:
  the board outline again, w0.254